# Altium PCB PCB_DOAN2.PcbDoc
Units mil, origin at the board's own origin, x right, y up, seen from the top; angles counter-clockwise.
Board outline 6120 x 4955 mil, 2 copper layers (Top Layer, Bottom Layer); 45 components, 55 nets, 205 pads, 4 vias.
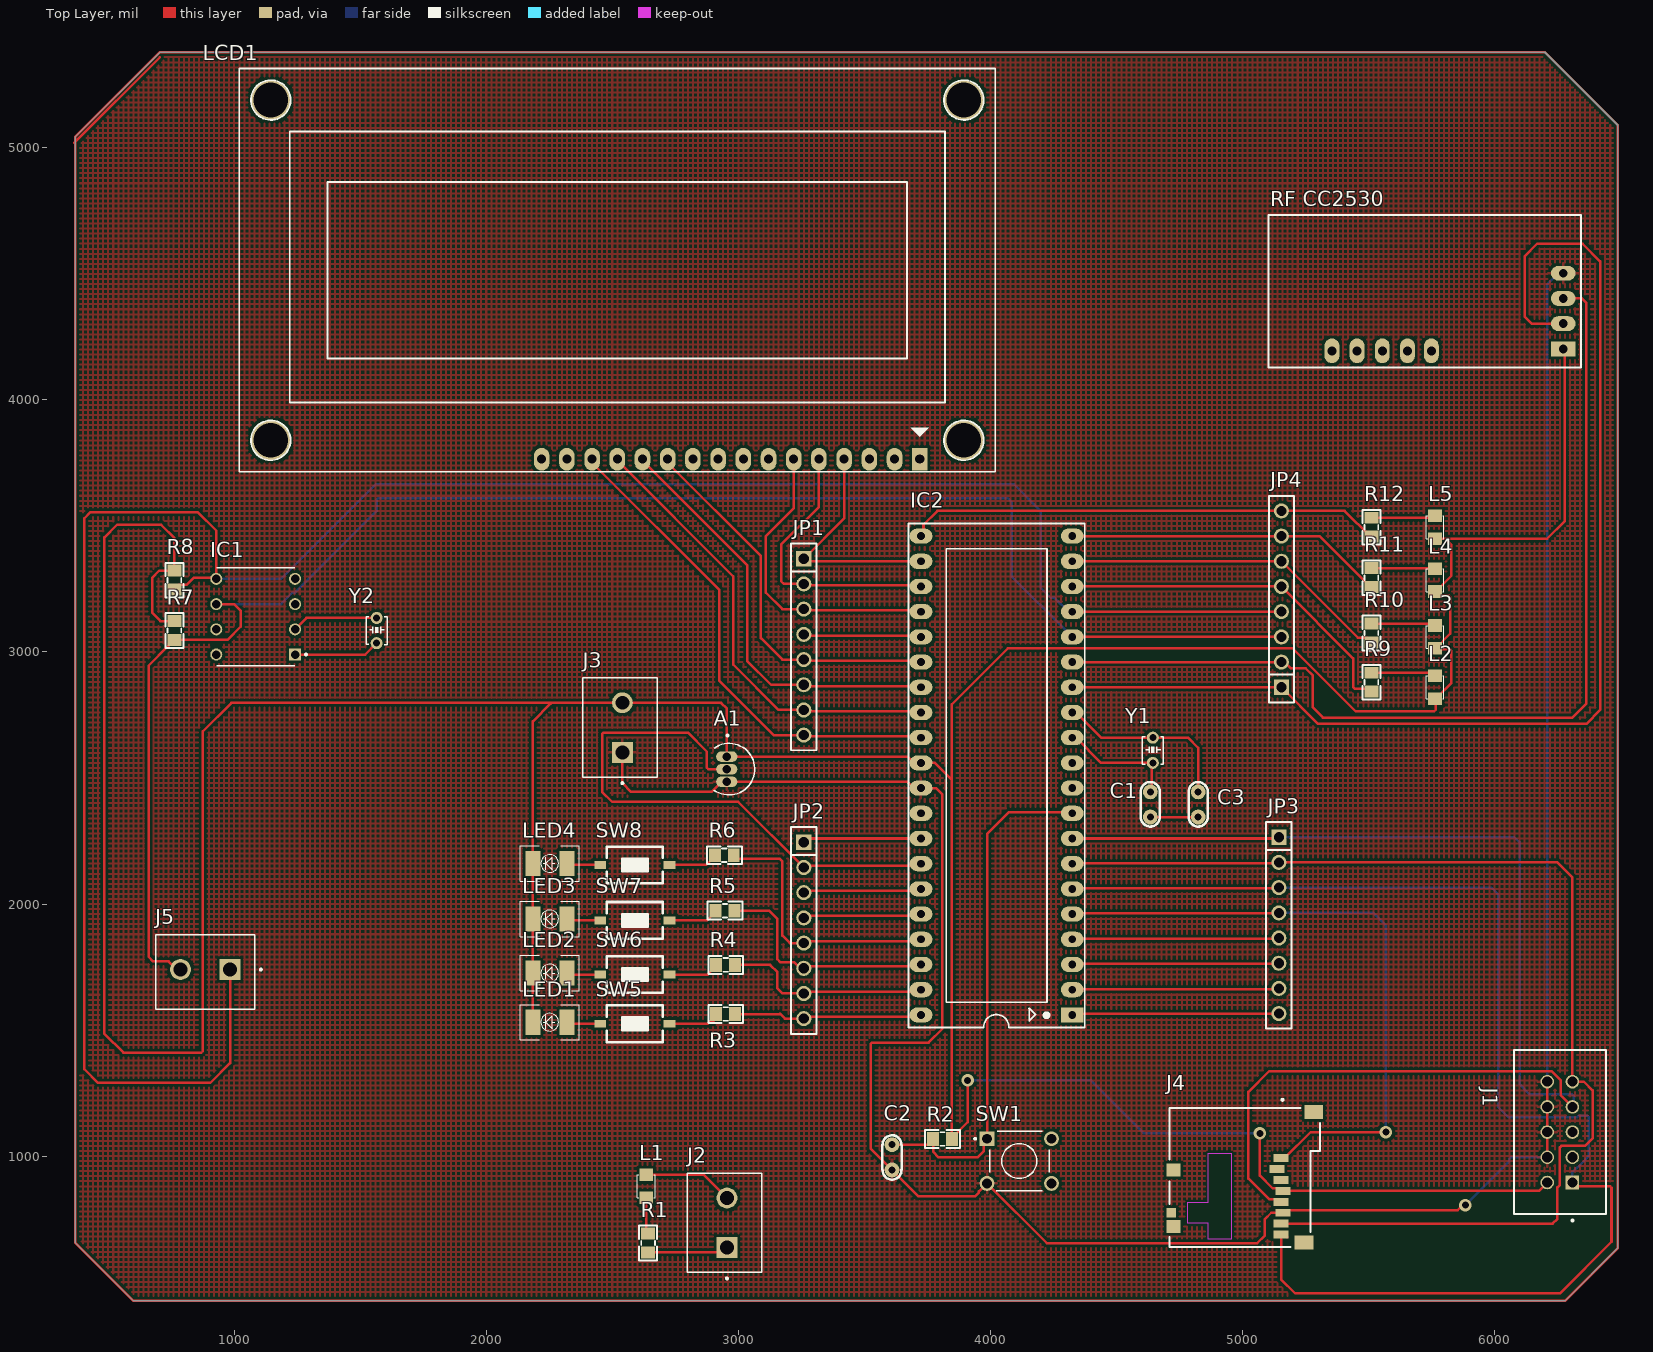
[diagram p0: Top Layer view]
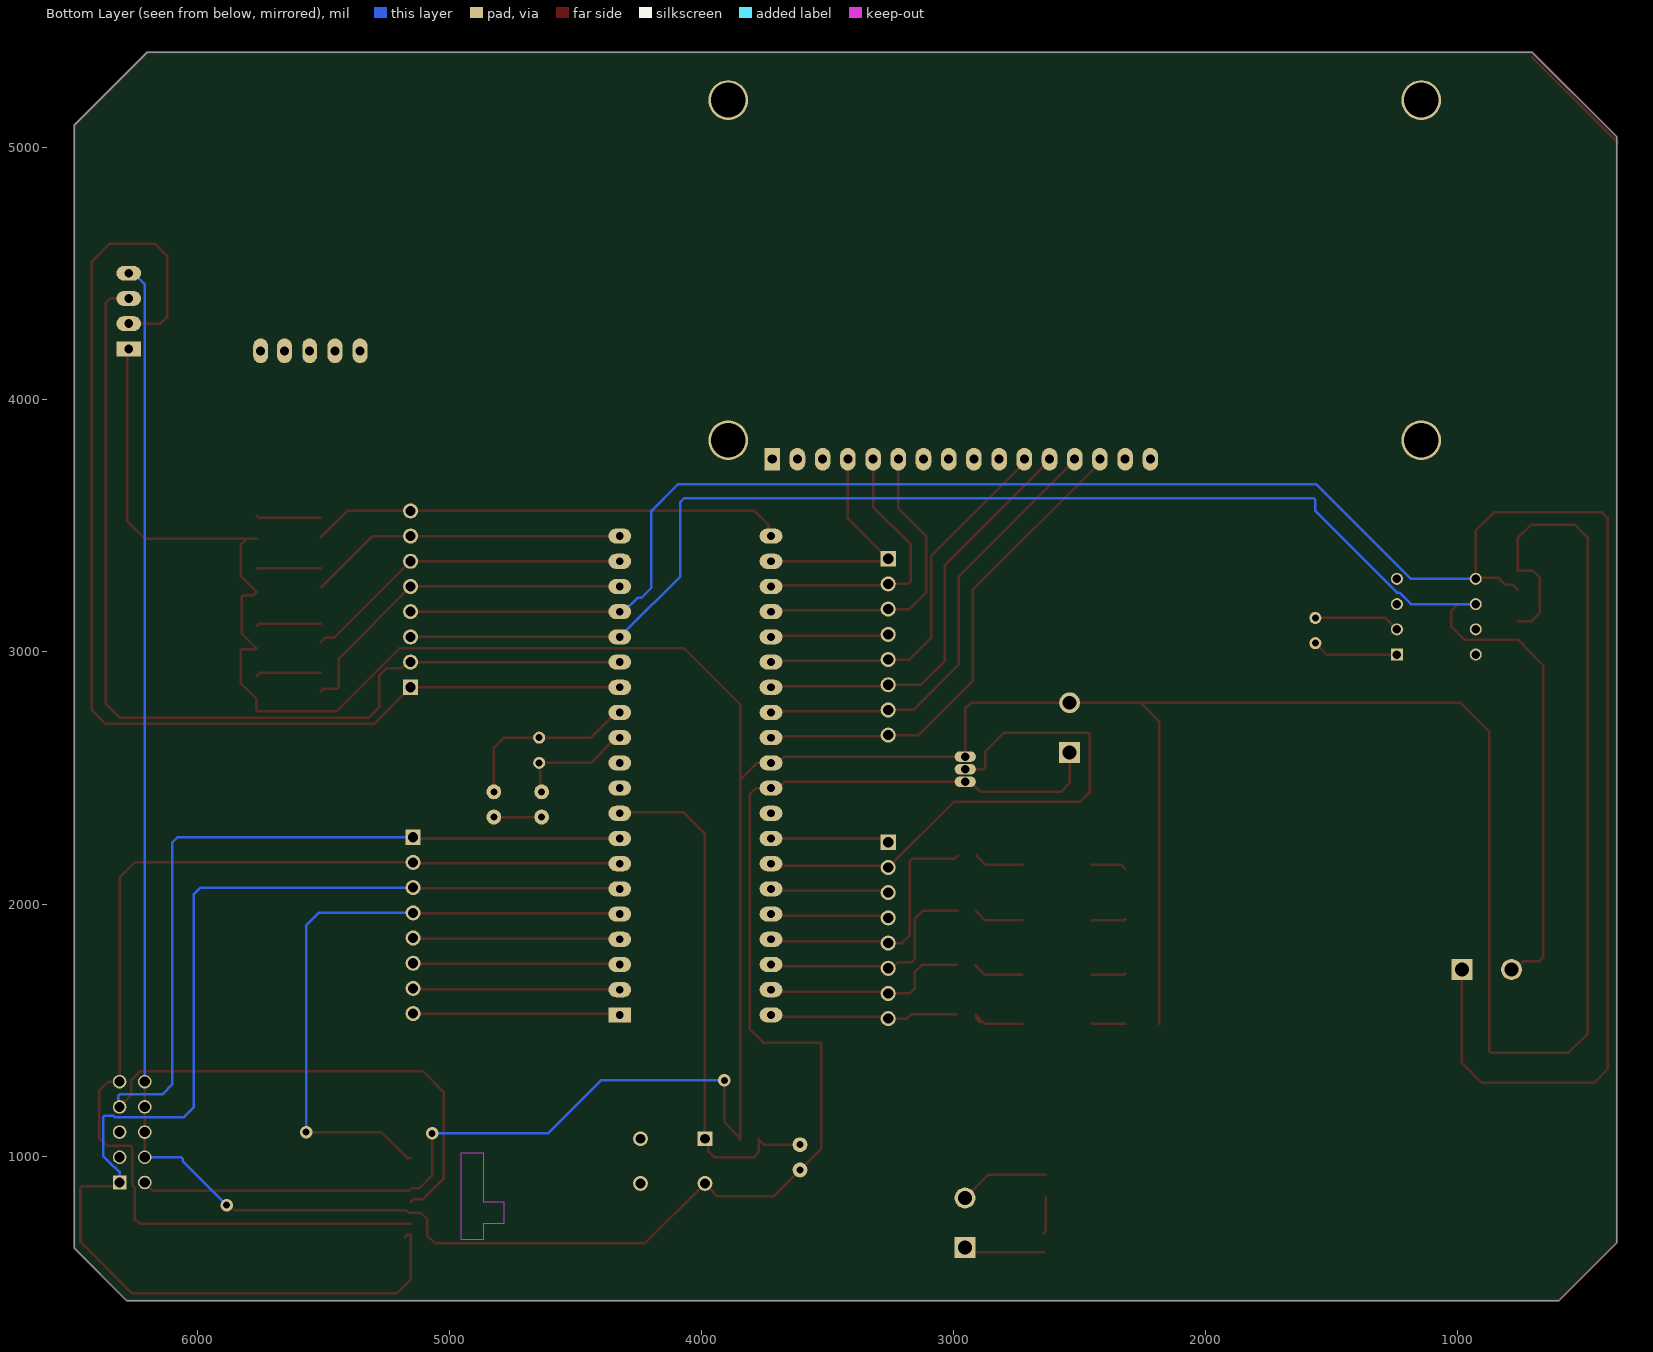
[diagram p1: Bottom Layer view, seen from below]
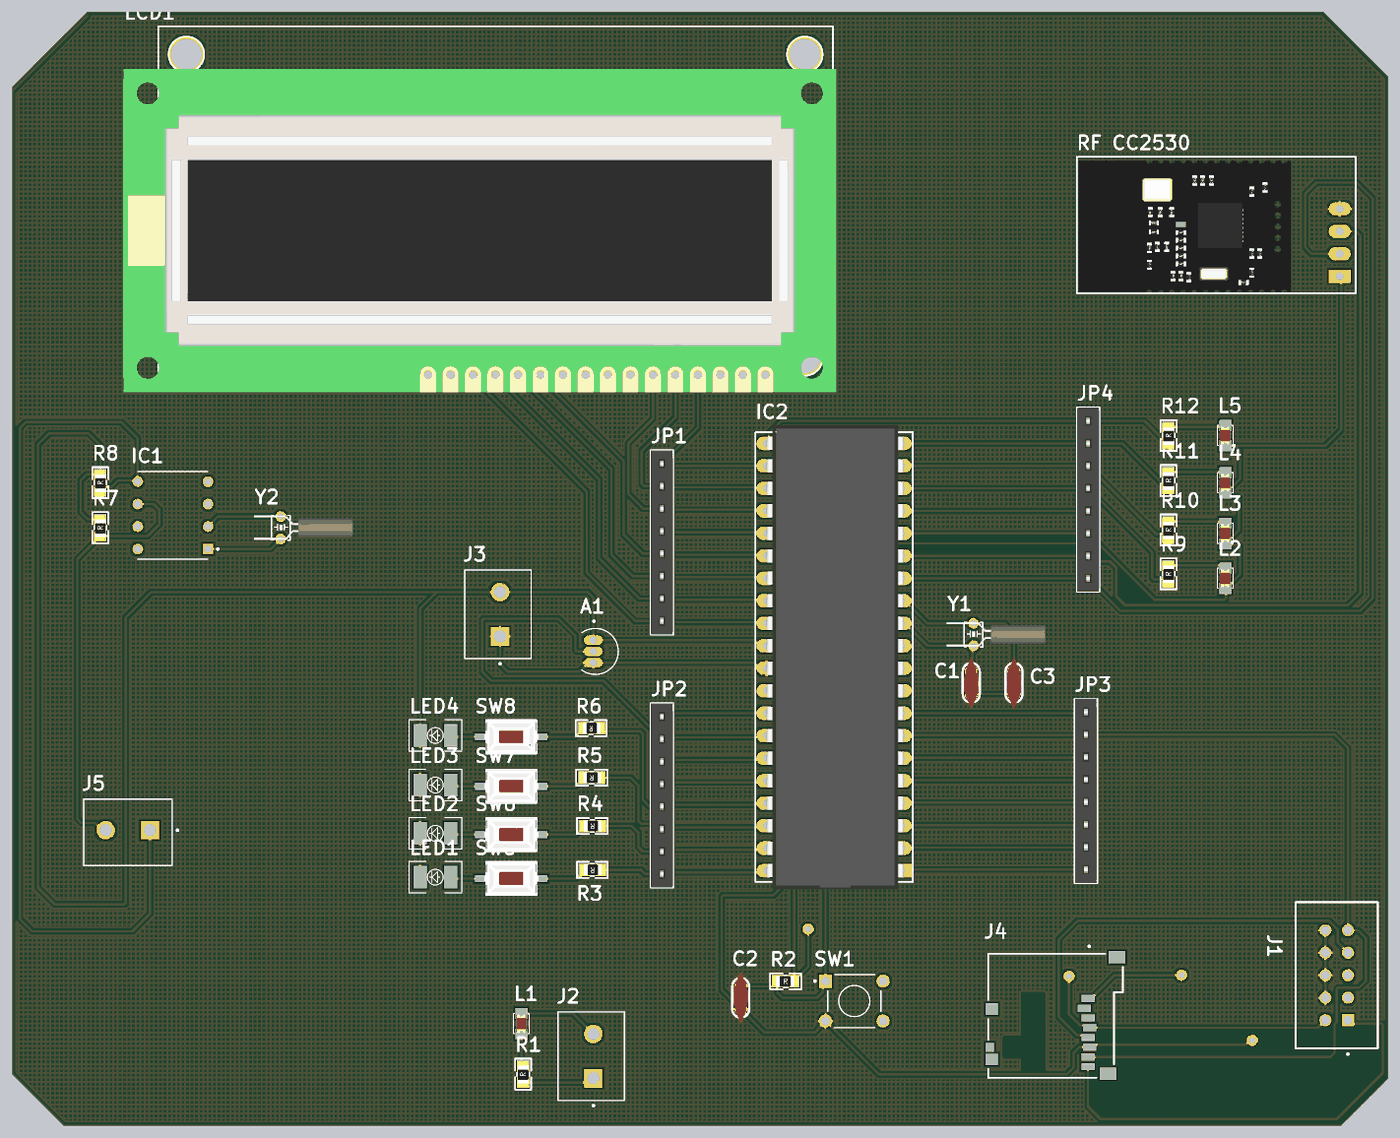
[diagram p2: 3D render of the assembled board from above, using the file's embedded part models]

## Layer stack, top to bottom
Top Solder: solder mask 0.4, Solder Resist, Dk 3.5
Top Layer: signal copper 1.4
Dielectric 1: dielectric 12.6, FR-4, Dk 4.8
Bottom Layer: signal copper 1.4
Bottom Solder: solder mask 0.4, Solder Resist, Dk 3.5

## Board outline
600,425 370,655 370,5045 705,5380 6200,5380 6490,5090 6490,635 6280,425

## Design rules (kind name [scope] priority, off if disabled: settings)
Clearance [All] p1: gap=10 ignorepadtopadclearanceinfootprint=FALSE except(0: Arc-Hole Track-Hole SMDPad-Hole THPad-Hole Via-Hole Fill-Hole Poly-Hole Region-Hole Text-Hole)
PolygonConnect [All] p1: connectstyle=Relief reliefconductorwidth=10 reliefentries=4 polygonreliefangle="90 Angle" airgapwidth=10
RoutingVias [All] p1: holewidth=28 width=50 viastyle="Through Hole" minholewidth=28 minwidth=50 maxholewidth=28 maxwidth=50
SolderMaskExpansion [All] p1: expansion=4 istentingtop=FALSE
Width [All] p1: maxlimit=10 minlimit=10 preferedwidth=10
30 further rules are at their usual default settings.

## Components (designator, comment, footprint, x,y, rotation, side; value= is the part's Value field where it differs from the comment)
A1 "LM35" TO92127P521H735-3 2985,2535 r270 top
C1 "102" "tu gom" 4635,2395 r270 top
C2 "104" "tu gom" 3610,995 r90 top
C3 "102" "tu gom" 4825,2395 r270 top
IC1 "DS1307" DIP794W47P254L991H457Q8 1085,3140 r180 top
IC2 "ATMEL 16A" DIP40/W0.6 4325,1560 r90 top value="Atmega 16L"
J1 "NAP CODE" SAMTEC_ZSS-105-09-L-D-1290 6310,895 r90 top
J2 "NGUON_VAO" HANDSON_KF301-2P 2955,735 r90 top
J3 "NGUON_RA" HANDSON_KF301-2P 2540,2700 r90 top
J4 "SD CARD" GCT_MEM2051-00-195-00-A_REVD1 5010,915 r90 top
J5 "KF301-2P" HANDSON_KF301-2P 885,1740 r180 top
JP1 "JP 1x8 2.54" "JP 1x8 CT" 3260,3370 r270 top
JP2 "JP 1x8 2.54" "JP 1x8 CT" 3260,2245 r270 top
JP3 "JP 1x8 2.54" "JP 1x8 CT" 5145,2265 r270 top
JP4 "JP 1x8 2.54" "JP 1x8 CT" 5155,2860 r90 top
L1 "LED 0805" LED-0805-Red 2635,835 r90 top
L2 "LED 0805" LED-0805-Red 5765,2905 r270 top
L3 "LED 0805" LED-0805-Red 5765,3105 r270 top
L4 "LED 0805" LED-0805-Red 5765,3330 r270 top
L5 "LED 0805" LED-0805-Red 5765,3540 r270 top
LCD1 "LCD 20X2A" LCD16X2 3720,3765 r180 top value=LCD16x2A
LED1 "LED-Red" LED-RED-0805 2320,1531 r180 top value=Red
LED2 "LED-Red" LED-RED-0805 2320,1726 r180 top value=Red
LED3 "LED-Red" LED-RED-0805 2320,1941 r180 top value=Red
LED4 "LED-Red" LED-RED-0805 2320,2161 r180 top value=Red
R1 "220k" "tro smd 0805" 2640,655 r90 top
R2 "10k" "tro smd 0805" 3810,1070 r0 top
R3 "220k" "tro smd 0805" 2950,1561.06 r180 top
R4 "220k" "tro smd 0805" 2950,1756.06 r180 top
R5 "220k" "tro smd 0805" 2947.57,1971.06 r180 top
R6 "220k" "tro smd 0805" 2945,2191.06 r180 top
R7 "10k" "tro smd 0805" 760,3085 r90 top
R8 "10k" "tro smd 0805" 760,3285 r90 top
R9 "220k" "tro smd 0805" 5510,2880 r90 top
R10 "220k" "tro smd 0805" 5510,3075 r90 top
R11 "220k" "tro smd 0805" 5510,3295 r90 top
R12 "220k" "tro smd 0805" 5510,3495 r90 top
"RF CC2530" "RF CC2530 UART" CC2530 6277.56,4206.81 r180 top
SW1 "NUT_RESET" SW_1825910-6-4 4115,980 r0 top
SW5 "SW" SW1-SMD 2590,1525 r0 top value="SW chip 2 pin"
SW6 "SW" SW1-SMD 2590,1720 r0 top value="SW chip 2 pin"
SW7 "SW" SW1-SMD 2590,1935 r0 top value="SW chip 2 pin"
SW8 "SW" SW1-SMD 2590,2155 r0 top value="SW chip 2 pin"
Y1 "8Mhz" "Thach Anh 2 Chan 32,768 KHz" 4645,2660 r0 top value=4Mhz
Y2 "32.768khz" "Thach Anh 2 Chan 32,768 KHz" 1565,3135 r0 top value=4Mhz

## Footprints (in the part's own frame and the unit in brackets; to place one, negate y for a bottom-side part, rotate by r counter-clockwise, add the part's x,y. Pads: shape width x height; smd on the part's side, far side on the other; paste and mask are expansions set on the pad)
CC2530 [mm]
  rect 2.5x1.5 hole 0.9: 1(0.1,0.1)
  oval 2.5x1.5 hole 0.9: 2(0.1,-2.44) 3(0.1,-4.98) 4(0.1,-7.52)
  oval 1.5x2.5 hole 0.9: 5(23.42,0.3) 6(20.88,0.3) 7(18.34,0.3) 8(15.8,0.3) 9(13.4,0.3)
  silkscreen extent -1.7,-13.4 29.8,2, body extent 5.6,-13 29.6,1.99, height 1.3
DIP40/W0.6 [mil] "40 PIN, W 600mil, Pin to pin 100mil"
  rect 60x90 hole 31: 1(0,0)
  oval 60x90 hole 31: 2(100,0) 3(200,0) 4(300,0) 5(400,0) 6(500,0) 7(600,0) 8(700,0) 9(800,0) 10(900,0) 11(1000,0) 12(1100,0) 13(1200,0) 14(1300,0) 15(1400,0) 16(1500,0) 17(1600,0) 18(1700,0) 19(1800,0) 20(1900,0) 21(1900,600) 22(1800,600) 23(1700,600) 24(1600,600) 25(1500,600) 26(1400,600) 27(1300,600) 28(1200,600) 29(1100,600) 30(1000,600) 31(900,600) 32(800,600) 33(700,600) 34(600,600) 35(500,600) 36(400,600) 37(300,600) 38(200,600) 39(100,600) 40(0,600)
  silkscreen extent -50,-50 1950,650, body extent -82,-10 1982,600, height 224
DIP794W47P254L991H457Q8 [mm]
  rect 1.21x1.21 hole 0.86: 1(-3.97,3.81)
  round 1.21 hole 0.86: 2(-3.97,1.27) 3(-3.97,-1.27) 4(-3.97,-3.81) 5(3.97,-3.81) 6(3.97,-1.27) 7(3.97,1.27) 8(3.97,3.81)
  silkscreen extent -5.17,-4.95 3.94,4.95
GCT_MEM2051-00-195-00-A_REVD1 [mm]
  rect 1x0.95 smd: CD(-3.56,7.425)
  rect 0.8x1.5 smd: P1(1.94,-3.66) P2(0.84,-3.26) P3(-0.26,-3.66) P4(-1.36,-3.86) P5(-2.46,-3.66) P6(-3.56,-3.86) P7(-4.66,-3.66) P8(-5.76,-3.66)
  rect 1.3x1.4 smd: S1(-4.95,7.2) S2(0.75,7.2)
  rect 1.4x1.9 smd: S3(6.6,-6.95) S4(-6.55,-5.95)
  Keep-Out Layer region: -2.51,3.67 2.45,3.67 2.45,1.37 -6.25,1.37 -6.25,3.67 -4.61,3.67 -4.61,5.74 -2.51,5.74
  silkscreen extent -7,-7.6 7.93,7.6
HANDSON_KF301-2P [mm]
  rect 2.1x2.1 hole 1.4: 1(-2.5,0)
  round 2.1 hole 1.4: 2(2.5,0)
  silkscreen extent -5.7,-3.5 5,4
"JP 1x8 CT" [mm] "8 row, straight, gold plating"
  rect 1.52x1.52 hole 1.02: 1(0,0)
  round 1.52 hole 1.02: 2(2.54,0) 3(5.08,0) 4(7.62,0) 5(10.16,0) 6(12.7,0) 7(15.24,0) 8(17.78,0)
  silkscreen extent -1.52,-1.27 19.3,1.27, body extent -1.52,-1.25 19.3,1.25, height 8.51
LCD16X2 [mil]
  rect 62x90 hole 36: 1(0,0)
  oval 62x90 hole 36: 2(100,0) 3(200,0) 4(300,0) 5(400,0) 6(500,0) 7(600,0) 8(700,0) 9(800,0) 10(900,0) 11(1000,0) 12(1100,0) 13(1200,0) 14(1300,0) 15(1400,0) 16(1500,0)
  round 157.48 hole 137.8: "Hole 0"(-175,-75) "Hole 0"(-175,-1425) "Hole 0"(2575,-1425) "Hole 0"(2575,-75)
  silkscreen extent -300,-1550 2700,50, body extent -315,-1360 2855,77, height 414
LED-0805-Red [mil]
  rect 50x55 smd: 1(0,0) 2(90,0)
  silkscreen extent 0,-35 90,35, body extent 5,-25 85,25, height 43
LED-RED-0805 [mil]
  rect 60x100 smd: 1(0,0) 2(135,0)
  silkscreen extent -50,-70 185,70, body extent -20,-60 154,60, height 75
SAMTEC_ZSS-105-09-L-D-1290 [mm]
  rect 1.37x1.37 hole 1.02: 01(0,0)
  round 1.37 hole 1.02: 02(0,2.54) 03(2.54,0) 04(2.54,2.54) 05(5.08,0) 06(5.08,2.54) 07(7.62,0) 08(7.62,2.54) 09(10.16,0) 10(10.16,2.54)
  silkscreen extent -3.92,-3.36 13.33,5.9
SW1-SMD [mm]
  rect 1.2x0.8 smd: 1(-3.5,0) 2(3.5,0)
  silkscreen extent -2.82,-1.85 2.82,1.85, body extent -3.05,-1.85 3.05,1.85, height 2.5
SW_1825910-6-4 [mm]
  rect 1.498x1.498 hole 0.99: 1(-3.25,2.25)
  round 1.498 hole 0.99: 2(3.25,2.25) 3(-3.25,-2.25) 4(3.25,-2.25)
  silkscreen extent -4.54,-3 3,3
"Thach Anh 2 Chan 32,768 KHz" [mil]
  round 48 hole 28: 1(0,0) 2(0,-100)
  silkscreen extent -42,-106 42,4, body extent -120,-105 321,6, height 66
TO92127P521H735-3 [mm]
  oval 1.07x2.14 hole 0.85: 1(-1.27,-0.775) 2(0,-0.775) 3(1.27,-0.775)
  silkscreen extent -3.5,-2.08 2.6,2.04
"tro smd 0805" [mm]
  rect 1.2x1.4 smd: 1(-0.946,-0.061) 2(0.954,-0.061)
  silkscreen extent -1.75,-0.97 1.75,0.84, body extent -1.56,-0.76 1.44,0.64, height 0.53
"tu gom" [mm] "Tu gom mini"
  round 1.5 hole 0.7: 1(-1.27,0) 2(1.27,0)
  silkscreen extent -2.25,-0.97 2.22,0.97, body extent -2.92,-0.85 2.92,0.85, height 6.12

## Part data
A1: library part LM35DZ/NOPB, Package=None, Availability=Unavailable, MP=LM35DZ/NOPB, Price=None
C1 C3: library part "Tu gom 102 50V", "Cắm", Chung_Loai=Cắm, Don_Vi=Con, Ma_Hang=MH004763, So_Chan=2, Ten_Linh_Kien="Tụ gốm 102 1nF 50V"
C2: library part "Tu gom 104 50V", "Cắm", Chung_Loai=Cắm, Don_Vi=Con, Ma_Hang=MH004761, So_Chan=2, Ten_Linh_Kien="Tụ gốm 104 100nF 50V"
IC1: "Real Time Clock _RTC_ IC Clock/Calendar 56B IÂ²C, 2-Wire Serial 8-DIP _0.300, 7.62mm_", Package="DIP-8 Maxim Integrated", Availability=Unavailable, MF="Maxim Integrated", MP=DS1307, Price=None, SnapEDA_Link=https://www.snapeda.com/parts/DS1307/Maxim%20Integrated/view-part/9751/?ref=snap
IC2: library part ATmega16A-PU, "8-Bit AVR Microcontroller with 16K Bytes of In-System Programmable Flash Memory"
J1: library part ZSS-105-09-L-D-1290, Package=None, Availability=Unavailable, MP=ZSS-105-09-L-D-1290, Price=None
J2 J3: library part KF301-2P, "2 Pin Terminal Block 5mm Pitch", Package=None, Availability="Not in stock", Check_prices=https://www.snapeda.com/parts/KF301-2P/Handson+Technology/view-part/?ref=eda, MF="Handson Technology", MP=KF301-2P, Price=None, SnapEDA_Link=https://www.snapeda.com/parts/KF301-2P/Handson+Technology/view-part/?ref=snap
J4: library part MEM2051-00-195-00-A_REVD1, Package=None, Availability=Unavailable, MP=MEM2051-00-195-00-A_REVD1, Price=None
J5: "2 Pin Terminal Block 5mm Pitch", Package=None, Availability="Not in stock", Check_prices=https://www.snapeda.com/parts/KF301-2P/Handson+Technology/view-part/?ref=eda, MF="Handson Technology", MP=KF301-2P, Price=None, SnapEDA_Link=https://www.snapeda.com/parts/KF301-2P/Handson+Technology/view-part/?ref=snap
JP1 JP2 JP3 JP4: library part "JP 1x8 2.54 Cai Thang", "Cắm", Chung_Loai=Cắm, Don_Vi=Con, Ma_Hang=MH004006, Ten_Linh_Kien="Jump Đơn Cái 2.54MM 1x20P Thẳng"
L1 L2 L3 L4 L5: library part "LED 0805 Do", "Dán", Chung_Loai=Dán, Don_Vi=Con, Ma_Hang=MH000897, Ten_Linh_Kien="LED 0805 Màu Đỏ (Red)"
LCD1: library part LCD16x2A, "LCD dipslay 16 char, 2 line"
LED1 LED2 LED3 LED4: library part Led-Red, "LED Red 2mA 1.8V 0805", ComponentLink1Description=Datasheet, ComponentLink1URL="D:\Dropbox\Datasheets\Opto and Illumination\LEDs\SMD LED.pdf", Unit Price=0.0476
R1 R3 R4 R5 R6 R9 R10 R11 R12: library part "Tro 0805 1% 220k", "Dán", Chung_Loai=Dán, Don_Vi=Con, Ma_Hang=MH005484, So_Chan=2, Ten_Linh_Kien="Trở 0805 1% 220k"
R2 R7 R8: library part "Tro 0805 1% 10k", "Dán", Chung_Loai=Dán, Don_Vi=Con, Ma_Hang=MH005473, So_Chan=2, Ten_Linh_Kien="Trở 0805 1% 10k"
"RF CC2530": library part "RF CC2530 UART 2.4G", "IC chính: CC2530, 15.5 x 31.5mm", TECHMT.VN=TECHMT.VN
SW1: library part 1825910-6, "Switch Tactile OFF (ON) SPST Round Button PC Pins 0.05A 24VDC 100000Cycles 1.57N Thru-Hole Loose", Package=None, Availability=Unavailable, MP=1825910-6, Price=None
SW5 SW6 SW7 SW8: library part SW2, "Switch button 2 pin"
Y1 Y2: library part "Thach Anh 2 chan 32,768 Khz", "Crystal For all Crystal 2pin."

## Via types
v1: diameter 50, hole 28, Top Layer to Bottom Layer, 4 vias

## Nets (pads, with @x,y where several pads share a name; then routed paths per layer and width w, separated by ;. In a path a pad name is that pad's centre, name@x,y a point inside that pad or via, vN(x,y) a via of type N, cw(c..) or ccw(c..) an arc to the next point about the centre after c; other vN are vias at no path point)
button_1: IC2.40 JP2.8 R3.1 | length 752.9
  Top Layer w10: R3.1 3163.46,1563.46 3165,1565 3185,1545 JP2.8 3267.5,1552.5 3717.5,1552.5 IC2.40
button_2: IC2.39 JP2.7 R4.1 | length 829.1
  Top Layer w10: R4.1 3126.54,1758.46 3155,1730 3155,1665 3175,1645 JP2.7 3267.5,1652.5 3717.5,1652.5 IC2.39
button_3: IC2.38 JP2.6 R5.1 | length 934.3
  Top Layer w10: R5.1 3121.54,1973.46 3155,1940 3155,1780.86 3167.18,1768.68 3222.83,1768.68 3246.51,1745 JP2.6 3267.5,1752.5 3717.5,1752.5 IC2.38
button_4: IC2.37 JP2.5 R6.1 | length 1065.6
  Top Layer w10: R6.1 2995.68,2180 3164.14,2180 3175,2169.14 3175,1875 3205,1845 JP2.5 3267.5,1852.5 3717.5,1852.5 IC2.37
D4: IC2.26 JP1.5 LCD1.11 | length 1537.6
  Top Layer w10: LCD1.11 2720,3751 3090,3381 3090,3055 3175,2970 JP1.5 3265,2965 3720,2965 IC2.26
D5: IC2.27 JP1.6 LCD1.12 | length 1705.4
  Top Layer w10: LCD1.12 2620,3760 3035,3345 3035,2965 3130,2870 JP1.6 3265,2865 3720,2865 IC2.27
D6: IC2.28 JP1.7 LCD1.13 | length 1829.2
  Top Layer w10: LCD1.13 2520,3760 2980,3300 2980,2950 3160,2770 JP1.7 3265,2765 3720,2765 IC2.28
D7: IC2.29 JP1.8 LCD1.14 | length 1982.4
  Top Layer w10: LCD1.14 2420,3751 2925,3246 2925,2885 3140,2670 JP1.8 3265,2665 3720,2665 IC2.29
DC1: IC2.18 JP4.5 R9.1 | length 1427.1
  Top Layer w10: IC2.18 JP4.5 5440,2975 5440,2860.86 5445.86,2855 5500.17,2855 R9.1
DC2: IC2.19 JP4.6 R10.1 | length 1320.9
  Top Layer w10: IC2.19 JP4.6 5458.61,3056.39 5493.77,3056.39 R10.1
DC3: IC2.20 JP4.7 R11.1 | length 1271.2
  Top Layer w10: IC2.20 JP4.7 5306.23,3460 5508.46,3257.77 R11.1
DC4: IC2.21 JP4.8 R12.1 | length 1891.7
  Top Layer w10: IC2.21 3735,3470 3735,3505 3790,3560 JP4.8 5406.23,3560 5508.46,3457.77 R12.1
E: IC2.24 JP1.3 LCD1.6 | length 1221.6
  Top Layer w10: LCD1.6 3220,3570 3110,3460 3110,3235 3175,3170 JP1.3 3265,3165 3720,3165 IC2.24
GND: "RF CC2530.4" A1.3 C2.1 IC2.31 J1.04 J1.06 J1.08 J1.10 J3.1 J4.P6 SW1.3 | length 9714.1
  Top Layer w10: J3.1 2540,2480 2575,2445 2893.43,2445 2933.43,2485 A1.3 3671.47,2485 3696.47,2460 IC2.31 3785,2460 3810,2435 3810,1505 3755,1450 3530.86,1450 3525,1444.14 3525,1030 C2.1 3715,840 3939.14,840 3955.1,855.95 3955.1,859.47 SW1.3 4224.53,653.94 5058.94,653.94 5090,685 5090,750 5114.84,774.84 J4.P6 5172.72,785.59 5854.77,785.59 5874.18,805 v1(5885,805) ; J1.04 J1.06 J1.08 J1.10
  Bottom Layer w10: v1(5885,805) 6060,980 6060,989.14 6065.86,995 J1.04 ; J1.10 6209.41,1295.59 6209.41,4458.35 6253.94,4502.87 6273.62,4502.87
LM35: A1.2 IC2.34 JP2.2 | length 2219.2
  Top Layer w10: A1.2 2880.86,2535 2875,2540.86 2875,2605 2800,2680 2465.86,2680 2460,2674.14 2460,2445 2500,2405 3000,2405 JP2.2 3267.5,2152.5 3717.5,2152.5 IC2.34
MISO: IC2.7 J1.09 J4.P7 JP3.2 | length 4643.1
  Top Layer w10: IC2.7 4327.5,2162.5 5142.5,2162.5 JP3.2 6250,2165 6310,2105 J1.09 6355,1295 6390,1260 6390,1070 6360,1040 6265.86,1040 6260,1034.14 6260,885.65 6250,875.65 6250,750 6231.54,731.54 J4.P7
MOSI: IC2.6 J1.01 J4.P8 JP3.3 | length 5219.5
  Top Layer w10: IC2.6 4327.5,2062.5 5142.5,2062.5 JP3.3 ; J4.P8@5178.62,677.48 5167.87,688.23 J4.P8 5154.09,510.91 5210,455 6260,455 6465,660 6465,874.14 6459.14,880 6325,880 J1.01
  Bottom Layer w10: JP3.3 5989.14,2065 6015,2039.14 6015,1195 6056.97,1153.03 6327.38,1153.03 6334.35,1160 6369.14,1160 6375,1154.14 6375,1000.65 6327.38,953.03 6326.06,953.03 6310,936.97 J1.01
NetC1_2: C1.2 C3.2 | length 190
  Top Layer w10: C1.2 C3.2
NetIC1_1: IC1.1 Y2.2 | length 342.3
  Top Layer w10: IC1.1 1520,2990 Y2.2
NetIC1_2: IC1.2 Y2.1 | length 342.3
  Top Layer w10: IC1.2 1286.3,3135 Y2.1
NetJ2_1: J2.1 R1.1 | length 320.4
  Top Layer w10: R1.1 2936.2,617.77 J2.1
NetJ2_2: J2.2 L1.2 | length 357.9
  Top Layer w10: L1.2 2863.43,925 J2.2
NetL1_1: L1.1 R1.2 | length 145.5
  Top Layer w10: L1.1 2635,699.97 R1.2
NetL2_1: L2.1 R9.2 | length 257.8
  Top Layer w10: R9.2 5752.43,2917.57 L2.1
NetL3_1: L3.1 R10.2 | length 255.7
  Top Layer w10: R10.2 5757.43,3112.57 L3.1
NetL4_1: L4.1 R11.2 | length 253.7
  Top Layer w10: R11.2 5762.43,3332.57 L4.1
NetL5_1: L5.1 R12.2 | length 255.7
  Top Layer w10: R12.2 5757.57,3532.57 L5.1
NetLED1_1: LED1.1 SW5.1 | length 132.2
  Top Layer w10: LED1.1@2320,1525 SW5.1
NetLED2_1: LED2.1 SW6.1 | length 134.3
  Top Layer w10: LED2.1@2320,1725 2325,1720 SW6.1
NetLED3_1: LED3.1 SW7.1 | length 134.3
  Top Layer w10: LED3.1@2320,1940 2325,1935 SW7.1
NetLED4_1: LED4.1 SW8.1 | length 138.4
  Top Layer w10: LED4.1@2320,2140 2335,2155 SW8.1
NetR3_2: R3.2 SW5.2 | length 227.5
  Top Layer w10: SW5.2 2877.91,1525 2912.43,1559.52 R3.2 ; 2895.03,1530 R3.2@2912.43,1547.39
NetR4_2: R4.2 SW6.2 | length 202.9
  Top Layer w10: SW6.2 2877.91,1720 2912.43,1754.52 R4.2
NetR5_2: R5.2 SW7.2 | length 200.4
  Top Layer w10: SW7.2 2875.48,1935 2910,1969.52 R5.2
NetR6_2: R6.2 SW8.2 | length 197.9
  Top Layer w10: SW8.2 2872.91,2155 2907.43,2189.52 R6.2
PA4: IC2.36 JP2.4 | length 471.2
  Top Layer w10: JP2.4 3267.5,1952.5 3717.5,1952.5 IC2.36
PA5: IC2.35 JP2.3 | length 471.2
  Top Layer w10: JP2.3 3267.5,2052.5 3717.5,2052.5 IC2.35
PA7: IC2.33 JP2.1 | length 471.2
  Top Layer w10: JP2.1 3275,2260 IC2.33
PB0: IC2.1 JP3.8 | length 822.1
  Top Layer w10: IC2.1 4330,1565 JP3.8
PB1: IC2.2 JP3.7 | length 822.1
  Top Layer w10: IC2.2 4327.5,1662.5 5142.5,1662.5 JP3.7
PB2: IC2.3 JP3.6 | length 822.1
  Top Layer w10: IC2.3 4327.5,1762.5 5142.5,1762.5 JP3.6
PB3: IC2.4 JP3.5 | length 822.1
  Top Layer w10: IC2.4 4327.5,1862.5 5142.5,1862.5 JP3.5
PC3: IC2.25 JP1.4 | length 469.1
  Top Layer w10: JP1.4 3265,3065 3720,3065 IC2.25
PD2: IC1.6 IC2.16 J5.2 JP4.3 R7.1 | length 6733.7
  Top Layer w10: J5.2 771.66,1740 739.28,1772.38 678.48,1772.38 660,1790.86 660,2945.38 739.83,3025.21 739.83,3029.15 758.46,3047.77 R7.1 972.77,3047.77 1025.86,3100.86 1025.86,3109.14 1025,3110 1025,3164.14 999.14,3190 IC1.6 ; IC2.16 JP4.3
  Bottom Layer w10: IC1.6 1186.4,3190 1231.96,3235.56 1241.76,3235.56 1565,3558.8 1565,3604.14 1570.86,3610 4070,3610 4085,3595 4085,3300 4300.43,3084.57 4300.43,3083.1 4323.53,3060 IC2.16
PD3: IC1.5 IC2.17 J5.1 JP4.4 R8.1 | length 8908.4
  Top Layer w10: R8.1 781.02,3266.39 811.39,3266.39 840,3295 923.7,3295 IC1.5 928.7,3481.3 855,3555 430,3555 405,3530 405,1345 460,1290 905,1290 983.43,1368.43 J5.1 J5.1@980,1736.57 ; IC2.17 JP4.4
  Bottom Layer w10: IC1.5 1186.4,3290 1561.4,3665 4095,3665 4200,3560 4200,3255 4240,3215 4255,3215 4310,3160 IC2.17
RESET: C2.2 IC2.9 R2.1 SW1.1 | length 2081.2
  Top Layer w10: C2.2 3754.1,1045 R2.1@3772.77,1063.67 ; R2.1 R2.1@3772.77,1063.67 ; IC2.9 4320,2365 4075,2365 3987.05,2277.05 SW1.1 3975,1056.54 3975,1020 3950,995 3795,995 3772.77,1017.23 R2.1@3772.77,1063.67
RS: IC2.22 JP1.1 LCD1.4 | length 930.4
  Top Layer w10: LCD1.4 3420,3530 JP1.1 3270,3360 IC2.22
RW: IC2.23 JP1.2 LCD1.5 | length 1109.9
  Top Layer w10: LCD1.5 3320,3575.99 3170,3425.99 3170,3280.86 3180.86,3270 JP1.2 3265,3265 3720,3265 IC2.23
RX: "RF CC2530.2" IC2.14 JP4.1 | length 4711.9
  Top Layer w10: IC2.14 JP4.1 5300,2715 6365,2715 6420,2770 6420,4550 6350,4620 6170,4620 6120,4570 6120,4330.86 6147.98,4302.87 6273.62,4302.87
SCK: IC2.8 J1.07 J4.P5 JP3.1 | length 4950.9
  Top Layer w10: IC2.8 5140,2260 JP3.1 ; J4.P5 5143.35,828.9 5106.1,828.9 5024.14,910.86 5024.14,1254.14 5106.97,1336.97 6227.38,1336.97 6264.49,1299.86 6264.49,1240.51 J1.07
  Bottom Layer w10: JP3.1 6080,2265 6100,2245 6100,1285 6140,1245 6309.14,1245 6315,1239.14 6315,1200 J1.07
SS: IC2.5 J4.P1 JP3.4 | length 2546.6
  Top Layer w10: IC2.5 4327.5,1962.5 5142.5,1962.5 JP3.4 ; J4.P1 5167.87,991.38 5271.5,1095 v1(5570,1095)
  Bottom Layer w10: JP3.4 5520,1965 5570,1915 v1(5570,1095)
TX: "RF CC2530.3" IC2.15 JP4.2 | length 3916.9
  Top Layer w10: IC2.15 JP4.2 5168.49,2960 5193.49,2935 5251.72,2935 5280,2906.72 5280,2780 5320,2740 6310,2740 6365,2795 6365,4385 6347.13,4402.87 6273.62,4402.87
VCC: "RF CC2530.1" A1.1 IC2.30 J1.02 J3.2 J4.P4 L2.2 L3.2 L4.2 L5.2 LED1.2 LED2.2 LED3.2 LED4.2 R2.2 R7.2 R8.2 | length 17809.5
  Top Layer w10: R7.2 707.43,3122.57 675,3155 675,3295 702.57,3322.57 R8.2 762.39,3452.61 710,3505 535,3505 485,3455 485,1485 560,1410 869.14,1410 875,1415.86 875,2685 988.43,2798.43 J3.2 2931.57,2798.43 2954.49,2775.51 A1.1 3671.47,2585 3696.47,2560 IC2.30 3780,2560 3847.57,2492.43 ; LED1.2@2185,1525 2185,2725 2255,2795 ; R2.2@3850,1065.18 R2.2 R2.2@3847.57,1071.54 ; v1(3910,1300) 3910,1133.97 R2.2@3847.57,1071.54 ; v1(5070,1090) 5070,922.37 5120.16,872.2 5151.22,872.2 J4.P4 6176.46,861.46 J1.02 ; L5.2 5805,3450 ; 6273.62,4202.87 6280,4196.5 6280,3520 6210,3450 5805,3450 ; R2.2@3847.57,1071.54 3847.57,2492.43 ; 3847.57,2492.43 3847.57,2792.57 4070,3015 5200,3015 5450,2765 5761.64,2765 5767.5,2770.86 5767.5,2815 5830,2877.5 5830,3004.14 5824.14,3010 5770,3010 L3.2 5767.5,3015 5825,3072.5 5825,3219.14 5819.14,3225 5780,3225 L4.2 5767.5,3240 5830,3302.5 5830,3425 5805,3450
  Bottom Layer w10: v1(3910,1300) 4400,1300 4610,1090 v1(5070,1090)
X1: C3.1 IC2.13 Y1.1 | length 733
  Top Layer w10: IC2.13 4340,2760 4440,2660 Y1.1 4785,2660 4825,2620 C3.1
X2: C1.1 IC2.12 Y1.2 | length 480.6
  Top Layer w10: IC2.12 4340,2660 4440,2560 Y1.2 4640,2555 4640,2450 C1.1
pads on no net: "LCD1.Hole 0" "RF CC2530.5" "RF CC2530.6" "RF CC2530.7" "RF CC2530.8" "RF CC2530.9" IC1.3 IC1.4 IC1.7 IC1.8 IC2.10 IC2.11 IC2.32 J1.03 J1.05 J4.CD J4.P2 J4.P3 J4.S1 J4.S2 J4.S3 J4.S4 LCD1.1 LCD1.2 LCD1.3 LCD1.7 LCD1.8 LCD1.9 LCD1.10 LCD1.15 LCD1.16 SW1.2 SW1.4
copper on no net: | length 22010.7
  Top Layer w10: 365,5020 705,5360 ; 925,3090 928.7,3090 ; 370,655 600,425 885,425 6280,425 6490,635 6490,5090 6200,5380 705,5380 370,5045 370,940 370,655

## Polygon pours and split planes (outlines as drawn)
GND on Top Layer "GND_L01_P000" (hatched 90Degree grid 20 track 8, remove dead copper, pour order 0): 370,5035 735,5400 735,5410 6190,5410 6520,5080 6520,640 6490,640 6265,415 600,415 600,425 360,665 360,5045